# Altium PCB Dumber.PcbDoc
Units mm, origin at the board's own origin, x right, y up, seen from the top; angles counter-clockwise.
Board outline 86 x 88 mm, 2 copper layers (Top Layer, Bottom Layer); 55 components, 52 nets, 255 pads, 217 vias.
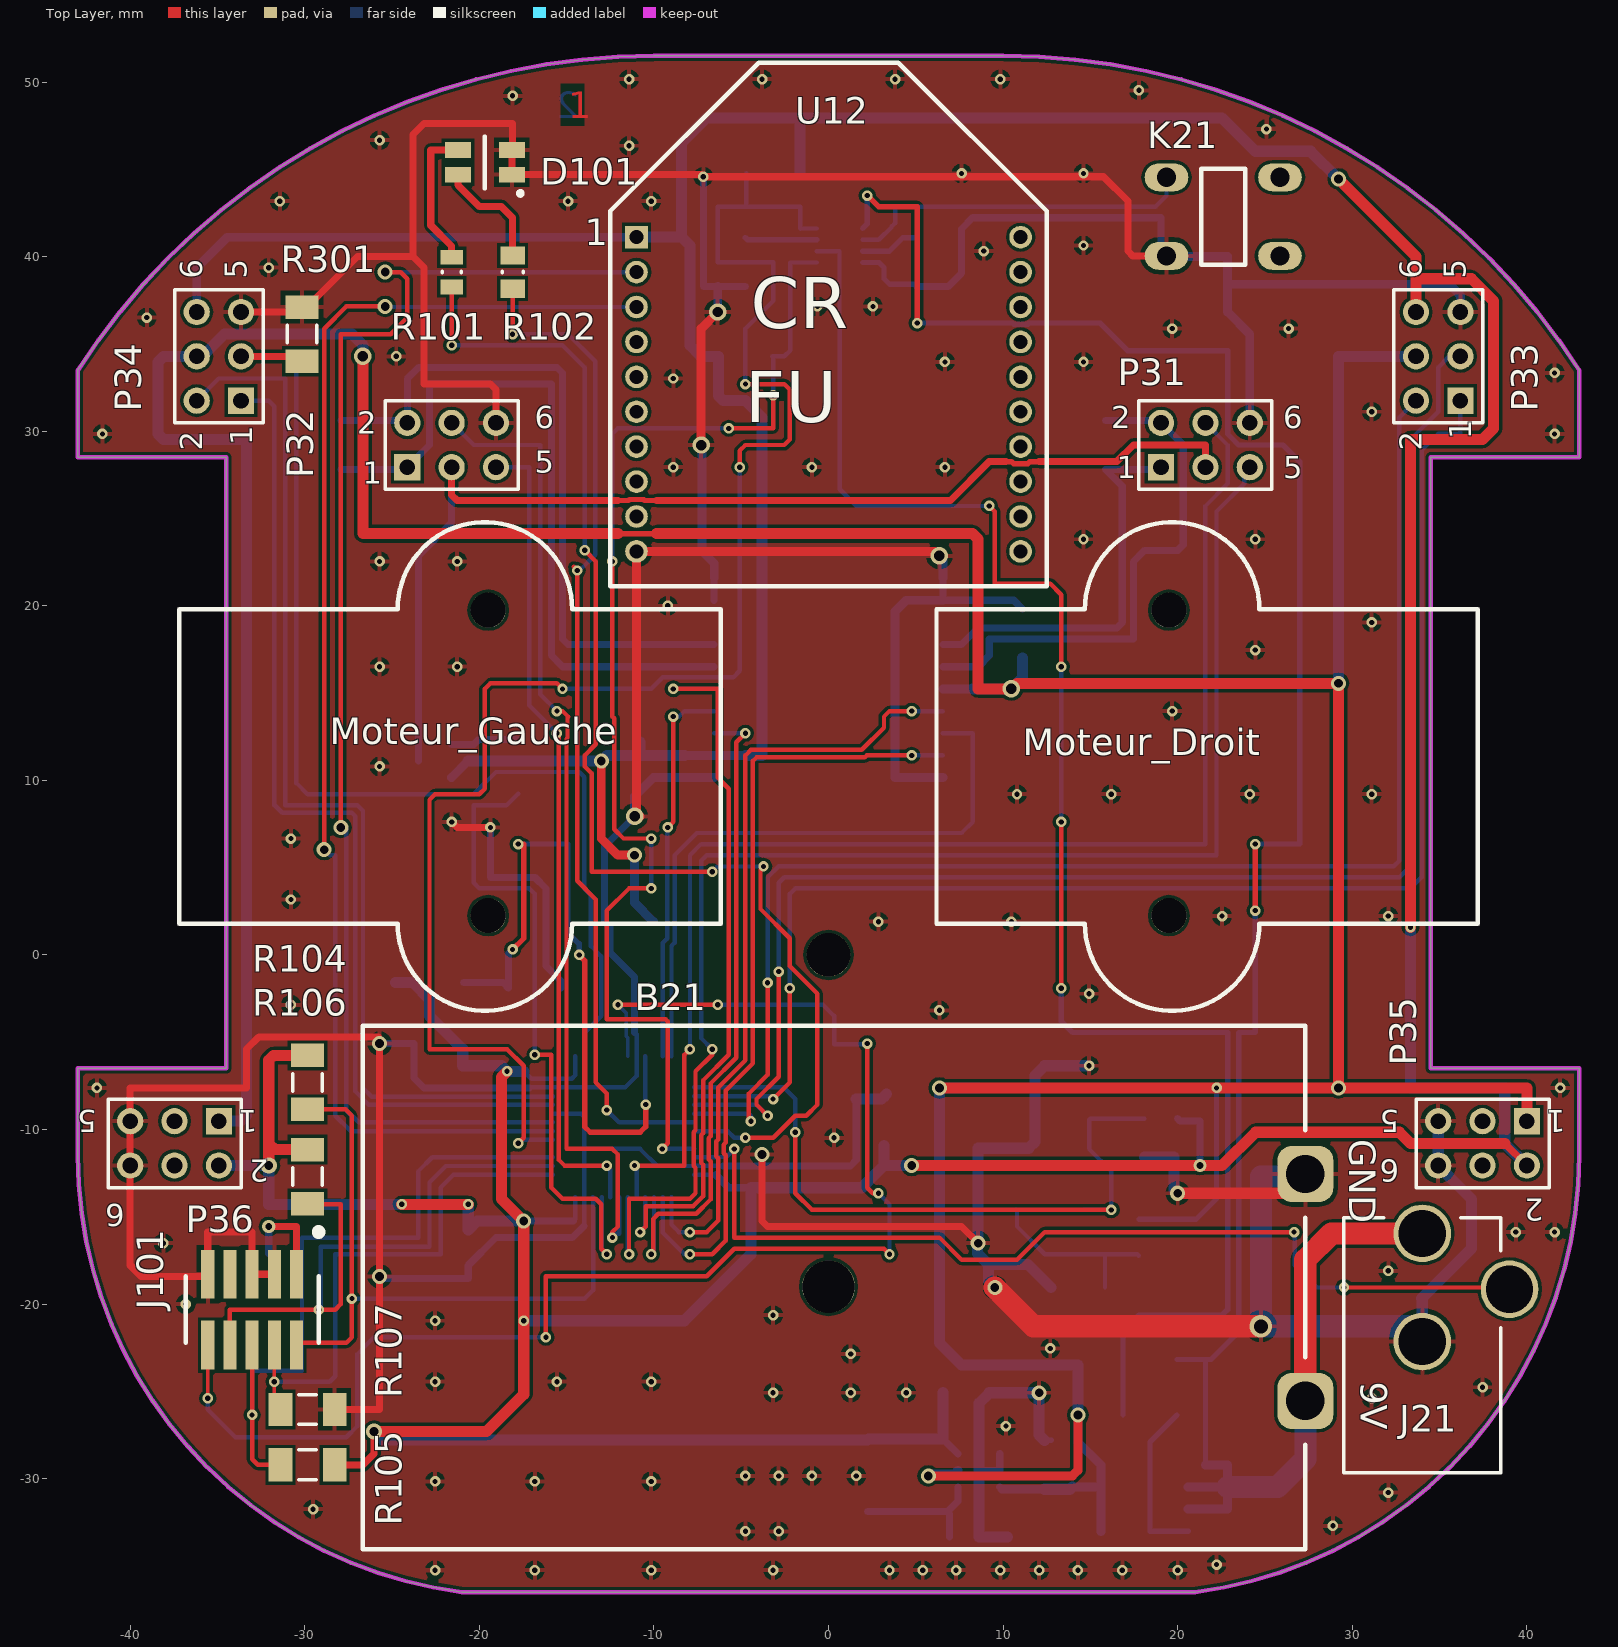
[diagram p0: Top Layer view]
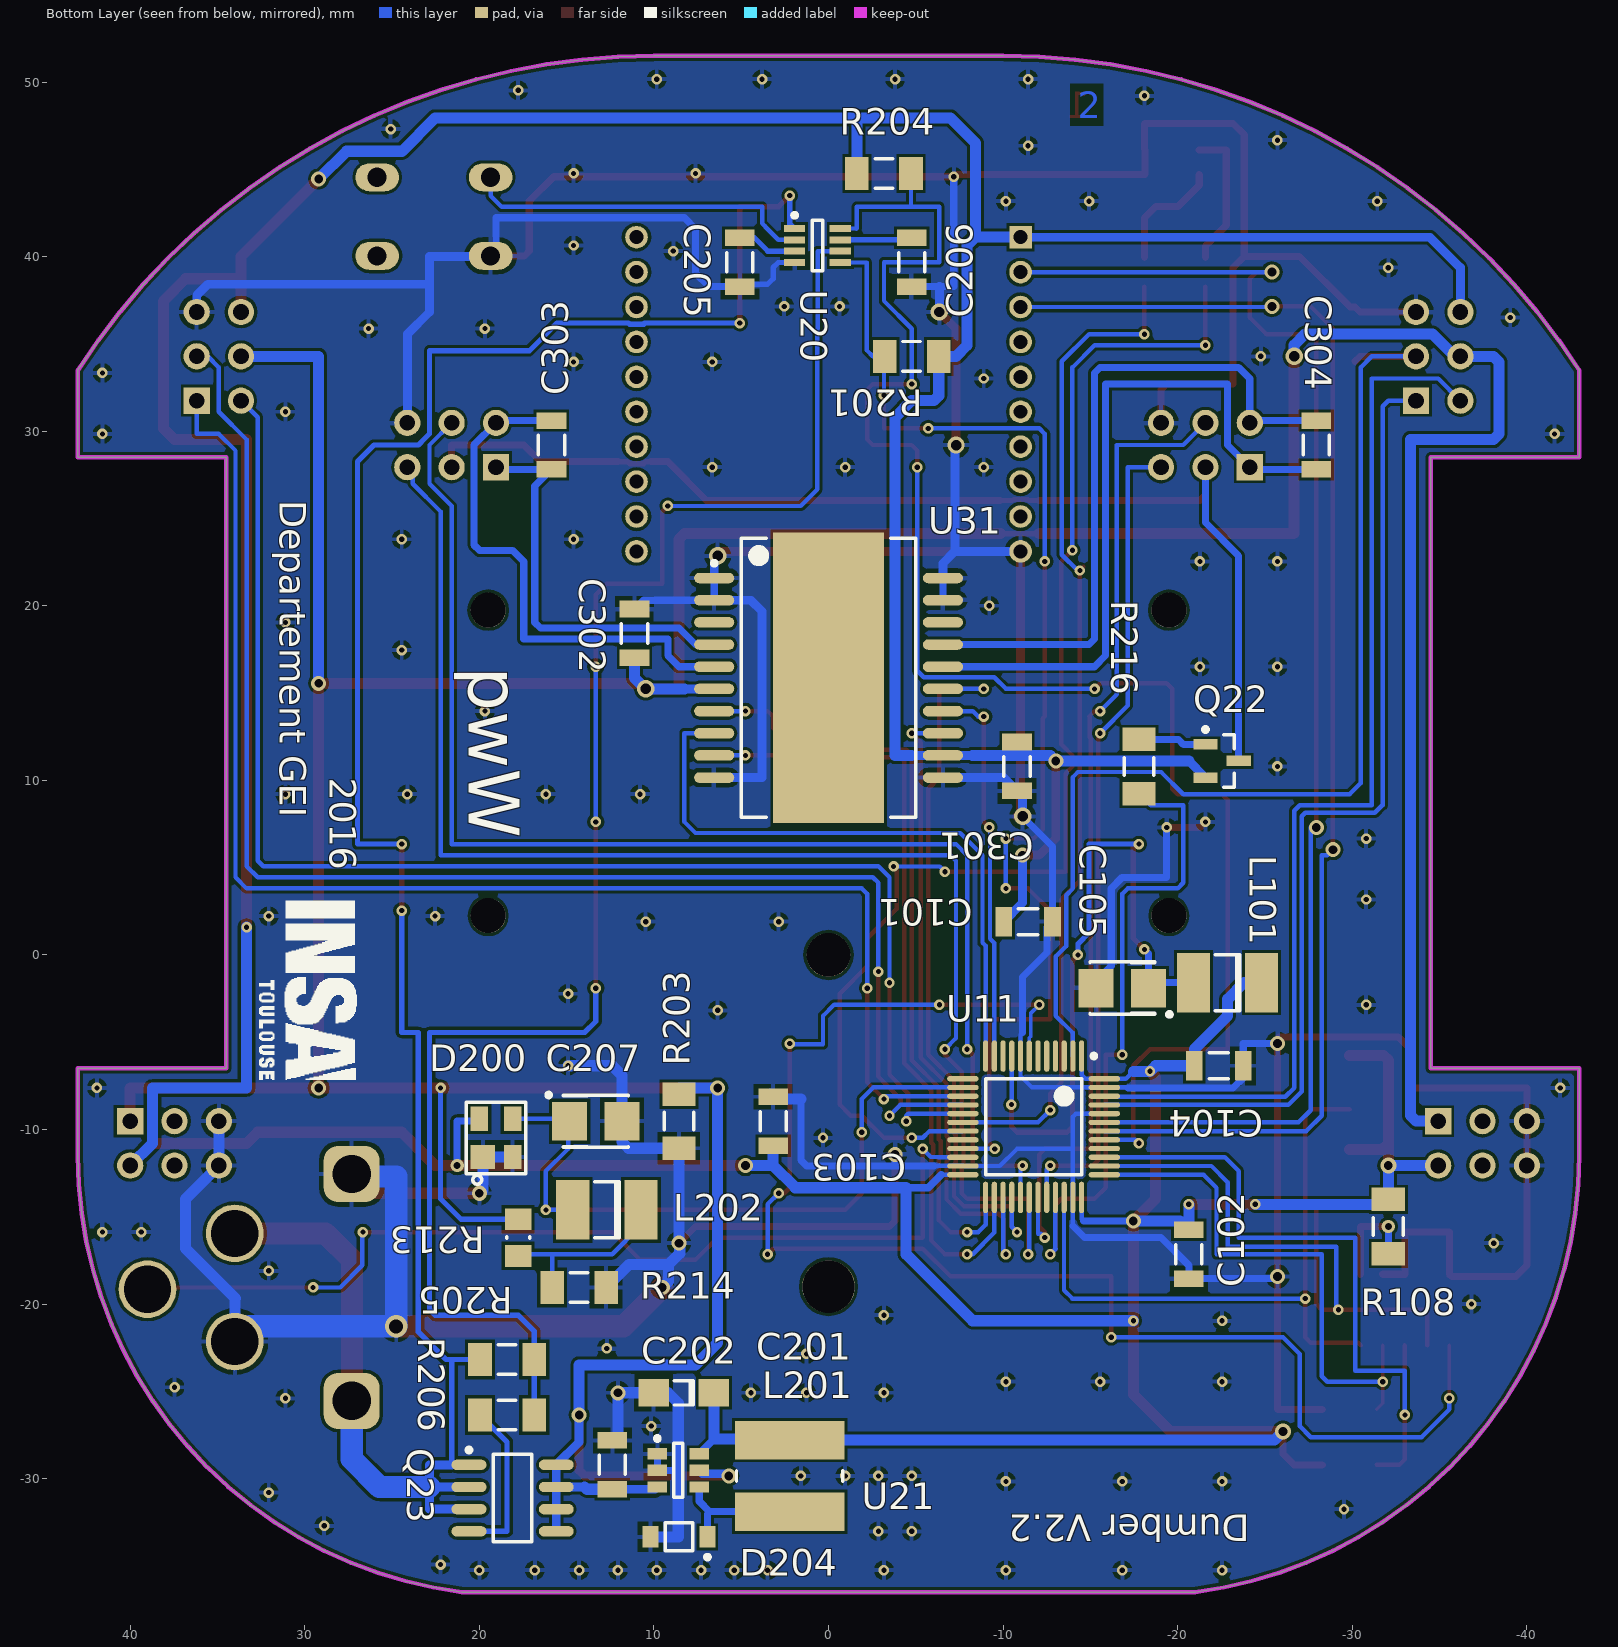
[diagram p1: Bottom Layer view, seen from below]

## Layer stack, top to bottom
Top Solder: solder mask 0.0102, Solder Resist, Dk 3.5
Top Layer: signal copper 0.0356
Dielectric 1: dielectric 0.32, FR-4, Dk 4.8
Bottom Layer: signal copper 0.0356
Bottom Solder: solder mask 0.0102, Solder Resist, Dk 3.5

## Board outline
34.5,28.5 43,28.5 43,33.5 41.838,35.204 40.588,36.845 39.254,38.419 37.838,39.919 36.346,41.344 34.781,42.688 33.148,43.948 31.451,45.12 29.694,46.202 27.883,47.189 26.023,48.081 24.118,48.873 22.174,49.564 20.197,50.152 18.192,50.636 16.164,51.013 14.119,51.283 12.062,51.446 10,51.5 -10,51.5 -12.062,51.446 -14.119,51.283 -16.164,51.013 -18.192,50.636 -20.197,50.152 -22.174,49.564 -24.118,48.873 -26.023,48.081 -27.883,47.189 -29.694,46.202 -31.451,45.12 -33.148,43.948 -34.781,42.688 -36.346,41.344 -37.838,39.919 -39.254,38.419 -40.588,36.845 -41.838,35.204 -43,33.5 -43,28.5 -34.5,28.5 -34.5,-6.5 -43,-6.5 -43,-11.5 -42.946,-13.152 -42.783,-14.798 -42.513,-16.429 -42.137,-18.039 -41.656,-19.62 -41.072,-21.167 -40.389,-22.672 -39.608,-24.129 -38.733,-25.532 -37.768,-26.875 -36.717,-28.151 -35.585,-29.355 -34.376,-30.483 -33.096,-31.529 -31.75,-32.489 -30.344,-33.359 -28.883,-34.135 -27.376,-34.813 -25.827,-35.391 -24.243,-35.866 -22.632,-36.236 -21,-36.5 21,-36.5 22.632,-36.236 24.243,-35.866 25.827,-35.391 27.376,-34.813 28.883,-34.135 30.344,-33.359 31.75,-32.489 33.096,-31.529 34.376,-30.483 35.585,-29.355 36.717,-28.151 37.768,-26.875 38.733,-25.532 39.608,-24.129 40.389,-22.672 41.072,-21.167 41.656,-19.62 42.137,-18.039 42.513,-16.429 42.783,-14.798 42.946,-13.152 43,-11.5 43,-6.5 34.5,-6.5

## Design rules (kind name [scope] priority, off if disabled: settings)
Clearance [All] p1: gap=0.178
ComponentClearance [All] p1 off: gap=0 collisioncheckmode=3 verticalgap=2540 showdistances=FALSE
HoleSize [All] p1: absolutevalues=TRUE maxlimit=6 minlimit=0.3 maxpercent=80.000 minpercent=20.000
MinimumAnnularRing [IsPad] p1: minimumring=0.203
MinimumSolderMaskSliver [All] p1: minsoldermaskwidth=0.046
PolygonConnect [All] p1: connectstyle=Relief reliefconductorwidth=0.254 reliefentries=4 polygonreliefangle="90 Angle" airgapwidth=0.254
RoutingVias RoutingVias__Power2 [InNetClass('Charge_Power')] p1: holewidth=0.6 width=1 viastyle="Through Hole" minholewidth=0.3 minwidth=0.6 maxholewidth=0.8 maxwidth=1.3
RoutingVias RoutingVias_power [InNetClass('Main_Power')] p2: holewidth=0.6 width=1 viastyle="Through Hole" minholewidth=0.4 minwidth=0.76 maxholewidth=0.7 maxwidth=1.22
RoutingVias [All] p3: holewidth=0.4 width=0.76 viastyle="Through Hole" minholewidth=0.3 minwidth=0.6 maxholewidth=0.5 maxwidth=0.86
SMDNeckDown [All] p1: percent=95.000
SilkToSilkClearance [All] p1: silktosilkclearance=0.1
SilkToSolderMaskClearance [IsPad] p1: minsilkscreentomaskgap=0.1 clearancetoexposedcopper=TRUE
SolderMaskExpansion [All] p1: expansion=0.102
UnpouredPolygon [All] p1: allowunpoured=FALSE
Width Width_Bat [InNetClass('Charge_Power')] p1: maxlimit=1.27 minlimit=0.203 preferedwidth=0.635
Width Width_Main [InNetClass('Main_Power')] p2: maxlimit=0.889 minlimit=0.203 preferedwidth=0.508
Width [All] p3: maxlimit=0.406 minlimit=0.203 preferedwidth=0.305
24 further rules are at their usual default settings.

## Classes and differential pairs
net class Main_Power: 3V3 3V3_ENCODERS 9V
net class Charge_Power: GND VBAT
component class Power: B21 C201 C202 C205 C206 C207 D200 D204 J21 K21 L201 L202 Q22 Q23 R201 R203 R204 R205 R206 R213 R214 R216 U20 U21
component class Mecanique: C301 C302 C303 C304 Moteur_Droit Moteur_Gauche P31 P32 P33 P34 P35 P36 R301 U31
component class cpu: C101 C102 C103 C104 C105 D101 J101 L101 R101 R102 R104 R105 R106 R107 R108 U11 U12

## Components (designator, comment, footprint, x,y, rotation, side; value= is the part's Value field where it differs from the comment)
B21 "Batterie" batterie 0.318,-19.05 r180 top locked
C101 "CAP 100nF" CAPC1206(3216)170_L -11.43,1.905 r0 bottom
C102 "CAP 100nF" CAPC1206(3216)170_L -20.637,-17.145 r90 bottom
C103 "CAP 100nF" CAPC1206(3216)170_L 3.175,-9.525 r270 bottom
C104 "CAP 100nF" CAPC1206(3216)170_L -22.355,-6.35 r0 bottom
C105 "T491B" B#1 -16.828,-1.905 r0 bottom
C201 "CAP 10µF" CAPC1206(3216)100_L 12.383,-29.21 r270 bottom
C202 "CAP 150µF" B#2 8.29,-25.082 r0 bottom
C205 "CAP 10nf" CAPC1206(3216)170_L 5.08,39.688 r90 bottom
C206 "CAP 68nF" CAPC1206(3216)170_L -4.763,39.688 r90 bottom
C207 "T491B" B#1 13.335,-9.525 r180 bottom
C301 "CAP 100nF" CAPC1206(3216)170_L -10.795,10.795 r270 bottom
C302 "CAP 100nF" CAPC1206(3216)170_L 11.112,18.415 r90 bottom
C303 "CAP 100nF" CAPC1206(3216)170_L 15.875,29.21 r270 bottom
C304 "CAP 100nF" CAPC1206(3216)170_L -27.94,29.21 r270 bottom
D101 "150141RV73100" 3528_A -19.685,45.402 r180 top
D200 "8240136" SOT143-4L 19.05,-10.477 r90 bottom
D204 "MBR130T1G" ONSC-SOD-123-2-425-04_V 8.572,-33.337 r0 bottom
J21 "WURTH-PWR_2.5" Wurth_2.5 36.513,-19.05 r90 top
J101 "Cortex-M Debug 10pins" "Cortex M Debug" -33.02,-20.32 r180 top locked
K21 "SPST MicroSwitch" SPST_MicroSwitch 22.86,42.545 r180 top
L101 "Inductor" 1812 -22.86,-1.587 r0 bottom
L201 "744052220" WE-TPC-5818-L 2.222,-29.845 r90 bottom
L202 "Inductor" 1812 12.7,-14.605 r0 bottom
Moteur_Droit "Bloc_roue" "Bloc roue"#1 -19.685,10.795 r180 top locked
Moteur_Gauche "Bloc_roue" "Bloc roue"#2 19.685,10.795 r0 top locked
P31 "Moteur gauche" HDR2X3 19.05,27.94 r0 top locked
P32 "Moteur droit" HDR2X3 -24.13,27.94 r0 top locked
P33 "Header 3X2" HDR2X3 36.195,31.75 r90 top locked
P34 "Header 3X2" HDR2X3 -33.655,31.75 r90 top locked
P35 "Header 3X2" HDR2X3 40.005,-9.525 r180 top locked
P36 "Header 3X2" HDR2X3 -34.925,-9.525 r180 top locked
Q22 "PMV50XP,215" NXP-SOT23_N -22.542,11.112 r180 bottom
Q23 "SI4435DY" SO-8_N 18.098,-31.115 r180 bottom
R101 "1K8 5% 0805(2012)" RESC0805(2012)_N -18.098,39.115 r270 top
R102 "330R 5% 0805(2012)" RESC0805(2012)_L -21.59,39.115 r270 top
R104 "10K" RESC1206(3216)_M -29.845,-7.302 r90 top
R105 "10K" RESC1206(3216)_M -29.845,-29.21 r0 top
R106 "10K" RESC1206(3216)_M -29.845,-12.7 r90 top
R107 "10K" RESC1206(3216)_M -29.845,-26.035 r180 top
R108 "10K" RESC1206(3216)_M -32.067,-15.557 r90 bottom
R201 "10K" RESC1206(3216)_M -4.763,34.29 r0 bottom
R203 "10K" RESC1206(3216)_M 8.572,-9.525 r270 bottom
R204 "100K" RESC1206(3216)_M -3.175,44.767 r180 bottom
R205 "270K" RESC1206(3216)_M 18.415,-23.177 r180 bottom
R206 "270K" RESC1206(3216)_M 18.415,-26.352 r180 bottom
R213 "270K 5% 0805(2012)" RESC0805(2012)_M 17.78,-16.192 r90 bottom
R214 "100K" RESC1206(3216)_M 14.287,-19.05 r180 bottom
R216 "1K" RESC1206(3216)_M -17.78,10.795 r270 bottom
R301 "10K" RESC1206(3216)_M -30.162,35.56 r90 top
U11 "STM32F103C6T6" LQFP48_N -11.747,-9.842 r270 bottom
U12 "XBee" XBee 0,31.115 r0 top locked
U20 "LTC2954CTS8-2#TRPBF" LT-TS8-8-TSOT-23_V 0.635,40.64 r180 bottom
U21 "MAX1837EUT33" SOT23-6 8.608,-29.527 r180 bottom
U31 "L298P" PowerSO20_N 0,15.875 r180 bottom

## Footprints (in the part's own frame and the unit in brackets; to place one, negate y for a bottom-side part, rotate by r counter-clockwise, add the part's x,y. Pads: shape width x height; smd on the part's side, far side on the other; paste and mask are expansions set on the pad)
1812 [mm] "Chip Capacitor; Body 4.5 x 3.2 mm (LxW typ)"
  rect 1.9x3.4 smd: 1(-1.95,0) 2(1.95,0)
  silkscreen extent -0.7,-1.6 0.7,1.6
3528_A [mm] "Chip LED, 4-Leads, Body 2.8x3.5mm (max), Pitch 1.42mm, IPC Medium Density"
  rect 1.5x0.9 smd: 1(1.55,0.707) 2(1.55,-0.71) 3(-1.55,0.707) 4(-1.55,-0.707)
  silkscreen extent -2.16,-1.5 0.03,1.9, body extent -1.75,-1.4 1.75,1.4, height 1.87
B#1 [mm] "Capacitor, SM Tantalum; Body 3.5 x 2.8 mm (LxW typ)"
  rect 2x2.2 smd: 1(-1.5,0) 2(1.5,0)
  silkscreen extent -2.82,-1.5 1.85,1.62
B#2 [mm] "Chip Capacitor; Body 3.81 x 1.27 mm (LxW typ)"
  rect 1.75x1.6 smd: 1(-1.725,0) 2(1.725,0)
  silkscreen extent -0.55,-0.7 0.55,0.7
batterie [mm]
  rrect50% 3.2x3.2 hole 2.2: V+(-27,6.5) V-(-27,-6.5)
  silkscreen extent -27,-15 27,15
"Bloc roue"#1 [mm]
  round 0 all layers, no hole: 0(-0.185,8.545) 1(-0.185,-8.955)
  silkscreen extent -13.5,-14 17.5,14
"Bloc roue"#2 [mm]
  round 0 all layers, no hole: 0(-0.185,8.955) 1(-0.185,-8.545)
  silkscreen extent -13.5,-14 17.5,14
CAPC1206(3216)100_L [mm] "Chip Capacitor, Body 3.2x1.6mm, Height 1mm, IPC High Density"
  rect 0.95x1.7 smd: 1(-1.4,0) 2(1.4,0)
  silkscreen extent -0.55,-0.75 0.55,0.75, body extent -1.7,-0.9 1.7,0.9, height 1
CAPC1206(3216)170_L [mm] "Chip Capacitor, Body 3.2x1.6mm, Height 1.7mm, IPC High Density"
  rect 0.95x1.7 smd: 1(-1.4,0) 2(1.4,0)
  silkscreen extent -0.55,-0.75 0.55,0.75, body extent -1.7,-0.9 1.7,0.9, height 1.7
"Cortex M Debug" [mm] "Cortex M debug connector based on SAMTEC FTSH"
  rect 0.75x2.8 smd: 1(-2.54,-2.03) 2(-2.54,2.03) 3(-1.27,-2.03) 4(-1.27,2.03) 5(0,-2.03) 6(0,2.03) 7(1.27,-2.03) 8(1.27,2.03) 9(2.54,-2.03) 10(2.54,2.03)
  silkscreen extent -3.89,-4.52 3.81,1.91
HDR2X3 [mm] "Connector; Header; 3x2 Position"
  rect 1.5x1.5 hole 0.9: 1(0,0)
  round 1.5 hole 0.9: 2(0,2.54) 3(2.54,0) 4(2.54,2.54) 5(5.08,0) 6(5.08,2.54)
  silkscreen extent -1.27,-1.27 6.35,3.81
LQFP48_N [mm] "Thin QFP, 48-Leads, Body 7x7mm, Pitch 0.5mm, IPC Medium Density"
  oval 1.8x0.3 smd: 1(-4.05,2.75) 2(-4.05,2.25) 3(-4.05,1.75) 4(-4.05,1.25) 5(-4.05,0.75) 6(-4.05,0.25) 7(-4.05,-0.25) 8(-4.05,-0.75) 9(-4.05,-1.25) 10(-4.05,-1.75) 11(-4.05,-2.25) 12(-4.05,-2.75) 25(4.05,-2.75) 26(4.05,-2.25) 27(4.05,-1.75) 28(4.05,-1.25) 29(4.05,-0.75) 30(4.05,-0.25) 31(4.05,0.25) 32(4.05,0.75) 33(4.05,1.25) 34(4.05,1.75) 35(4.05,2.25) 36(4.05,2.75)
  oval 0.3x1.8 smd: 13(-2.75,-4.05) 14(-2.25,-4.05) 15(-1.75,-4.05) 16(-1.25,-4.05) 17(-0.75,-4.05) 18(-0.25,-4.05) 19(0.25,-4.05) 20(0.75,-4.05) 21(1.25,-4.05) 22(1.75,-4.05) 23(2.25,-4.05) 24(2.75,-4.05) 37(2.75,4.05) 38(2.25,4.05) 39(1.75,4.05) 40(1.25,4.05) 41(0.75,4.05) 42(0.25,4.05) 43(-0.25,4.05) 44(-0.75,4.05) 45(-1.25,4.05) 46(-1.75,4.05) 47(-2.25,4.05) 48(-2.75,4.05)
  silkscreen extent -4.17,-2.75 2.75,3.57, body extent -3.5,-3.5 3.5,3.5, height 1.6
LT-TS8-8-TSOT-23_V [mm] "SOT23, 8-Leads, Body 2.9x1.75mm, Pitch 0.65mm"
  rect 1.22x0.4 smd: 1(-1.31,0.975) 2(-1.31,0.325) 3(-1.31,-0.325) 4(-1.31,-0.975) 5(1.31,-0.975) 6(1.31,-0.325) 7(1.31,0.325) 8(1.31,0.975)
  silkscreen extent -1.43,-1.45 0.3,1.85, body extent -0.87,-1.45 0.88,1.45, height 1
NXP-SOT23_N [mm] "SOT23, 3-Leads, Body 3x1.4mm, Pitch 0.95mm, IPC Medium Density"
  rect 1.4x0.6 smd: 1(-0.95,0.95) 2(-0.95,-0.95) 3(0.95,0)
  silkscreen extent -1.08,-1.5 0.7,1.92, body extent -0.7,-1.5 0.7,1.5, height 1.1
ONSC-SOD-123-2-425-04_V [mm] "SOD, 2-Leads, Body 2.69x1.6mm"
  rect 0.91x1.22 smd: 1(-1.635,0) 2(1.635,0)
  silkscreen extent -1.76,-0.8 0.78,1.28, body extent -1.35,-0.8 1.35,0.8, height 1.35
PowerSO20_N [mm] "SOP, 20-Leads, Body 15.9x11mm, Pitch 1.27mm, IPC Medium Density"
  oval 2.3x0.6 smd: 1(-6.55,5.715) 2(-6.55,4.445) 3(-6.55,3.175) 4(-6.55,1.905) 5(-6.55,0.635) 6(-6.55,-0.635) 7(-6.55,-1.905) 8(-6.55,-3.175) 9(-6.55,-4.445) 10(-6.55,-5.715) 11(6.55,-5.715) 12(6.55,-4.445) 13(6.55,-3.175) 14(6.55,-1.905) 15(6.55,-0.635) 16(6.55,0.635) 17(6.55,1.905) 18(6.55,3.175) 19(6.55,4.445) 20(6.55,5.715)
  rect 6.35x16.65 smd: 21(0,0)
  silkscreen extent -6.68,-8 5,8, body extent -5.55,-8 5.55,8, height 3.6
RESC0805(2012)_L [mm] "Chip Resistor, Body 2.0x1.3mm, IPC High Density"
  rect 0.85x1.3 smd: 1(-0.85,0) 2(0.85,0)
  silkscreen extent -0.05,-0.55 0.05,0.55, body extent -1.1,-0.67 1.1,0.68, height 0.7
RESC0805(2012)_M [mm] "Chip Resistor, Body 2.0x1.3mm, IPC Low Density"
  rect 1.25x1.5 smd: 1(-1.05,0) 2(1.05,0)
  silkscreen extent -0.05,-0.65 0.05,0.65, body extent -1.1,-0.67 1.1,0.67, height 0.7
RESC0805(2012)_N [mm] "Chip Resistor, Body 2.0x1.3mm, IPC Medium Density"
  rect 1.05x1.4 smd: 1(-0.95,0) 2(0.95,0)
  silkscreen extent -0.05,-0.6 0.05,0.6, body extent -1.1,-0.67 1.1,0.68, height 0.7
RESC1206(3216)_M [mm] "Chip Resistor, Body 3.2x1.6mm, IPC Low Density"
  rect 1.35x1.9 smd: 1(-1.55,0) 2(1.55,0)
  silkscreen extent -0.5,-0.85 0.5,0.85, body extent -1.67,-0.87 1.67,0.87, height 0.75
SO-8_N [mm] "SOIC, 8-Leads, Body 4.9x3.9mm, Pitch 1.27mm, IPC Medium Density"
  oval 2x0.6 smd: 1(-2.5,1.905) 2(-2.5,0.635) 3(-2.5,-0.635) 4(-2.5,-1.905) 5(2.5,-1.905) 6(2.5,-0.635) 7(2.5,0.635) 8(2.5,1.905)
  silkscreen extent -2.63,-2.5 1.1,2.88, body extent -2,-2.5 2,2.5, height 1.75
SOT23-6 [mm]
  rect 1.1x0.65 smd: 1(-1.2,0.95) 2(-1.2,0) 3(-1.2,-0.95) 4(1.2,-0.95) 5(1.2,0) 6(1.2,0.95)
  silkscreen extent -1.32,-1.55 0.25,1.95, body extent -0.9,-1.55 0.9,1.55, height 1.45
SOT143-4L [mm] "SOT143-4L, 4-Leads, Body 2.95x2.4mm, Pitch 1.70/1.90mm"
  rect 1.4x1.4 smd: 1(-1.1,0.75)
  rect 1.4x1 smd: 2(-1.1,-0.95) 3(1.1,-0.95) 4(1.1,0.95)
  silkscreen extent -2.66,-1.7 2.05,1.7, body extent -1.2,-1.46 1.2,1.46, height 1.03
SPST_MicroSwitch [mm]
  oval 2.5x1.6 hole 1.1: 1(-3,2.5) 2(3.5,2.5) 3(-3,-2) 4(3.5,-2)
  silkscreen extent -1,-2.5 1.5,3
WE-TPC-5818-L [mm] "SMD Inductor, 2-Leads, Body 5.8 x 5.8 mm"
  rect 2.2x6.3 smd: 1(-2.05,0) 2(2.05,0)
  silkscreen extent -0.3,-3.05 0.3,3.05, body extent -2.9,-2.9 2.9,2.9, height 1.79
Wurth_2.5 [mm]
  round 3.3 hole 2.7: 1(3.1,2.5) 2(-3.1,2.5) 3(-0.1,-2.5)
  silkscreen extent -10.6,-2 4,7
XBee [mm] "XBee RF transceiver from Digi"
  rect 1.295x1.295 hole 0.8: 1(-11,10)
  round 1.295 hole 0.8: 2(-11,8) 3(-11,6) 4(-11,4) 5(-11,2) 6(-11,0) 7(-11,-2) 8(-11,-4) 9(-11,-6) 10(-11,-8) 11(11,-8) 12(11,-6) 13(11,-4) 14(11,-2) 15(11,0) 16(11,2) 17(11,4) 18(11,6) 19(11,8) 20(11,10)
  silkscreen extent -12.5,-10 12.5,20

## Part data
B21: "Keystone 1294"
C101 C102 C103 C104 C205 C206 C301 C302 C303 C304: library part CMP-1037-04201-1, "CAP 100nF 50V ±10% 1206 (3216 Metric) Thickness 1.7mm SMD"
C105 C207: "Solid Tantalum Chip Capacitor, Standard T491 Series - Industrial Grade"
C201: library part CMP-1037-01131-1, "CAP 10µF 25V ±10% 1206 (3216 Metric) Thickness 1mm SMD"
C202: library part 194D225X0015B2, "CAP Tantalum, Body B, 150µF / 6.3V"
D101: library part CMP-1430-00001-1, "SMD Bi-Color Top LED, WL-SBTW, Red & Bright Green"
D200: library part CMP-1486-00002-1, "TVS Diode WE-TVS-HS, VRWM=3.3V"
D204: library part CMP-1055-00423-1, "Schottky Power Rectifier, 2-Pin SOD-123, Pb-Free, Tape and Reel"
J21: "Low Voltage Power Supply Connector"
K21: "SPST - MicroSwitch"
L101 L202: "Inductor SMD"
L201: library part CMP-0227-00400-1, "SMD Shielded Tiny Power Inductor WE-TPC, L = 22.0 µH"
P31 P32: library part "Header 3X2", "Header, 3-Pin, Dual row"
P33 P34 P35 P36: "Header, 3-Pin, Dual row"
Q22: library part CMP-1258-00162-1, "Single P-Channel Trench MOSFET, -20 V, -55 to 150 degC, 3-Pin SOT23, Tape and Reel"
Q23: "P-Channel 30V (D-S) Rated  MOSFET"
R101: library part CMP-1013-00080-1, "1K8 0.125W 5% 0805 (2012 Metric)  SMD"
R102: library part CMP-1013-00062-1, "330R 0.125W 5% 0805 (2012 Metric)  SMD"
R104 R105 R106 R107 R108 R201 R203 R204 R205 R206 R214 R216 R301: library part CMP-1014-00098-1, "10K 0.25W 5% 1206 (3216 Metric)  SMD"
R213: library part CMP-1013-00132-1, "270K 0.125W 5% 0805 (2012 Metric)  SMD"
U11: "STM32 ARM-based 32-bit MCU with 32 Kbytes Flash, 48-pin LQFP, Industrial Temperature"
U12: "Xbee RF transceiver from Digi"
U20: library part CMP-0482-01492-1, "Pushbutton On / Off  Controller with µP Interrupt, 8-pin SOT23 (TS8-8), 0 to 70 degC, Pb-Free, Tape and Reel"
U21: library part MAX1837
U31: "Dual Full Bridge Driver"

## Free pads (board coordinates)
  round 2 hole 2 unplated: 1(-19.5,2.25) 1(-19.5,19.75) 1(19.5,2.25) 1(19.5,19.75)
  round 3 hole 3 unplated: 1(0,-19)
  round 2.5 hole 2.5 unplated: 1(0,0)

## Via types
v1: diameter 0.6, hole 0.3, Top Layer to Bottom Layer, tented both sides, 185 vias
v2: diameter 0.86, hole 0.5, Top Layer to Bottom Layer, tented both sides, 21 vias
v3: diameter 1, hole 0.6, Top Layer to Bottom Layer, tented both sides, 6 vias
v4: diameter 0.76, hole 0.4, Top Layer to Bottom Layer, tented both sides, 2 vias
v5: diameter 0.92, hole 0.5, Top Layer to Bottom Layer, tented both sides, 2 vias
v6: diameter 1.3, hole 0.8, Top Layer to Bottom Layer, tented both sides, 1 vias

## Nets (pads, with @x,y where several pads share a name; then routed paths per layer and width w, separated by ;. In a path a pad name is that pad's centre, name@x,y a point inside that pad or via, vN(x,y) a via of type N, cw(c..) or ccw(c..) an arc to the next point about the centre after c; other vN are vias at no path point)
3V3: C101.2 C102.2 C103.2 C104.2 C202.1 C301.1 D200.4 L101.1 L201.2 P33.6 P34.6 P35.2 P36.2 Q22.2 R104.2 R105.2 R106.2 R108.2 R201.1 R204.1 U11.1 U11.24 U11.36 U11.48 U12.1 U21.6 U31.12 | length 409.7
  Top Layer w0.406: R105.2 -26.67,-29.21 -26.035,-28.575 v5(-26.035,-27.305) ; 38.735,-10.795 P35.2
  Top Layer w0.508: v2(-13.018,11.112) -13.018,6.667 -12.065,5.715 v2(-11.112,5.715)
  Top Layer w0.635: v5(-32.067,-12.065) -32.067,-10.795 ; R106.2 -31.713,-11.15 -32.067,-10.795 ; R104.2 -31.787,-5.752 -32.067,-6.032 -32.067,-10.795 ; v5(-26.035,-27.305) -19.583,-27.305 -17.462,-25.185 v1(-17.462,-20.955) v2(-17.462,-15.24) -18.732,-13.97 -18.732,-6.985 v1(-18.415,-6.667) ; v1(-24.447,-14.287) v1(-20.637,-14.287) ; v2(4.763,-12.065) v4(21.273,-12.065) 22.543,-12.065 24.447,-10.16 32.703,-10.16 33.338,-10.795 38.735,-10.795 ; v2(29.21,44.45) 33.655,40.005 33.655,38.735 ; v1(33.338,1.587) 33.338,29.527 37.465,29.527 38.1,30.162 38.1,37.465 36.83,38.735 33.655,38.735 ; P33.6 33.655,38.735
  Bottom Layer w0.254: -17.462,-6.667 -17.037,-7.093 U11.48 -14.713,-7.093 -14.498,-6.878 U11.1 ; -14.605,-15.24 -14.498,-15.133 U11.36 ; U11.24 -6.457,-12.593
  Bottom Layer w0.406: v5@-32.385,-12.065 v5(-32.067,-12.065) ; v2(-17.462,-15.24) -14.605,-15.24 ; -6.457,-12.593 -5.715,-13.335 -4.445,-13.335 ; -1.625,47.905 -1.587,47.942 ; 6.745,-27.915 U21.6 ; D200.4 20.148,-9.525 21.273,-9.525 v4(21.273,-12.065)
  Bottom Layer w0.508: P34.6 -36.195,39.37 -34.45,41.115 U12.1 ; Q22.2 -20.643,11.112 ; v2(-11.112,5.715) -11.112,2.988 C101.2 ; -8.255,11.43 -6.868,11.43 -4.762,11.43
  Bottom Layer w0.635: P36.2 v5@-32.385,-12.065 ; v5@-32.067,-12.383 -32.067,-14.287 v1(-24.447,-14.287) ; v5(-26.035,-27.305) -25.545,-27.795 L201.2 2.282,-27.735 6.565,-27.735 C202.1 ; L101.1 -23.812,-1.587 -22.86,-2.54 -22.86,-3.492 -20.955,-5.397 C104.2 ; C104.2@-20.825,-6.35 -18.732,-6.35 v1(-18.415,-6.667) -17.462,-6.667 ; -20.643,11.112 v2(-13.018,11.112) -12.7,11.43 -10.795,11.43 ; v1(-20.637,-14.287) C102.2 -20.133,-15.24 v2(-17.462,-15.24) ; v1(-17.462,-20.955) -8.255,-20.955 -4.445,-17.145 -4.445,-13.335 1.905,-13.335 3.175,-12.065 ; U12.1 -8.413,41.115 ; C301.1 -10.795,11.43 ; -8.255,11.43 -10.795,11.43 ; -4.762,11.43 -3.81,11.43 -3.81,30.797 -4.763,31.75 -6.032,31.75 -6.312,32.03 R201.1 -7.302,34.29 -7.938,34.925 -7.938,40.64 -8.413,41.115 ; R204.1 -1.625,47.905 ; C103.2 3.175,-12.065 ; v2(4.763,-12.065) 3.175,-12.065 ; v2(29.21,44.45) 27.622,46.037 24.447,46.037 22.543,47.942 -1.587,47.942 -6.985,47.942 -8.413,46.515 -8.413,41.115 ; v1(33.338,1.587) 33.338,-7.62 38.735,-7.62 38.735,-10.795 P35.2
3V3_ENCODERS: P31.3 P32.3 Q22.3 | length 65.2
  Top Layer w0.305: -12.065,26.035 -11.463,26.035 -11.405,26.093 -10.595,26.093 -10.537,26.035 -9.842,26.035 ; 10.16,28.258 10.475,28.258 10.595,28.137 11.405,28.137 11.525,28.258 12.065,28.258
  Top Layer w0.406: P32.3 -21.59,26.353 -21.272,26.035 -12.065,26.035 ; -9.842,26.035 6.985,26.035 9.207,28.258 10.16,28.258 ; 12.065,28.258 16.51,28.258 17.462,29.21 21.59,29.21 P31.3
  Bottom Layer w0.406: Q22.3 -23.492,22.863 -21.59,24.765 P32.3
9V: C201.2 C302.1 P33.4 P34.4 P35.1 P36.1 Q23.5 Q23.6 Q23.7 Q23.8 R203.1 R213.2 U21.3 U21.5 U31.6 | length 292.7
  Top Layer w0.305: -12.065,24.13 -9.842,24.13
  Top Layer w0.508: v2(5.715,-29.845) 13.97,-29.845 14.287,-29.527 v2(14.287,-26.352) ; v3(10.477,15.24) v3@10.795,15.557
  Top Layer w0.635: v3(-26.67,34.29) -26.67,24.13 -12.065,24.13 ; -9.842,24.13 8.255,24.13 8.573,23.812 8.573,15.24 v3(10.477,15.24) ; v2(6.35,-7.62) v2(29.21,-7.62) ; v3@10.795,15.557 v2(29.21,15.557) v2(29.21,-7.62) ; 29.21,-6.985 v2(29.21,-7.62) ; P35.1 40.005,-7.62 v2(29.21,-7.62)
  Bottom Layer w0.305: R213.2 21.053,-15.142 22.225,-13.97 v1(22.225,-7.62)
  Bottom Layer w0.406: U21.3 U21.3@9.94,-30.61
  Bottom Layer w0.508: v2(5.715,-29.845) 5.839,-29.721 7.214,-29.721 U21.5 ; U31.6 8.255,15.24 ; U21.3@9.94,-30.61 C201.2 ; 13.97,-30.48 Q23.7 ; v2(14.287,-26.352) 14.287,-27.9 Q23.8 Q23.7 ; Q23.5 Q23.6 Q23.7
  Bottom Layer w0.635: P36.1 -33.655,-9.525 -33.337,-9.207 -33.337,29.527 -38.1,29.527 -38.417,29.845 -38.417,33.972 -38.1,34.29 P34.4 -35.878,34.29 -34.607,35.56 -27.305,35.56 -26.67,34.925 v3(-26.67,34.29) ; 8.255,15.24 v3(10.477,15.24) 11.112,15.875 C302.1 ; R203.1@8.572,-7.62 v2(6.35,-7.62) 6.35,-22.225 7.62,-23.495 14.287,-23.495 v2(14.287,-26.352) ; C201.2 13.84,-30.61 13.97,-30.48 ; v2(29.21,15.557) 29.21,18.732 29.21,34.29 P33.4
/RST: J101.10 U11.7 | length 84.6
  Top Layer w0.203: v1(-35.56,-25.4) J101.10
  Top Layer w0.254: v1(-16.192,-21.907) -16.192,-18.415 -6.985,-18.415 -5.397,-16.828 3.175,-16.828 v1(3.492,-17.145) ; v1(-12.065,-2.857) v1(-6.35,-2.857) ; v1(2.222,-5.08) 2.222,-13.335 2.54,-13.652 v1(2.857,-13.652)
  Bottom Layer w0.203: v1(-12.065,-2.857) -11.595,-3.327 -11.595,-4.645 -11.498,-4.742 U11.7
  Bottom Layer w0.254: v1(-35.56,-25.4) -35.56,-26.035 -33.972,-27.622 -27.622,-27.622 -26.987,-26.987 -26.987,-22.86 -26.035,-21.907 v1(-16.192,-21.907) ; v1(-6.35,-2.857) -0.318,-2.857 0.317,-3.492 0.317,-5.118 2.185,-5.118 v1(2.222,-5.08) ; v1(2.857,-13.652) 3.492,-14.287 v1(3.492,-17.145)
BUTTON_SENSE: R201.2 U11.21 U20.5 | length 71.2
  Top Layer w0.254: v1(-12.383,22.543) -12.383,13.652 -12.283,13.553 -12.283,7.203 -11.747,6.667 v1(-10.16,6.667) ; v1(-10.16,3.81) -11.43,3.81 -12.7,2.54 -12.7,-3.696 -9.322,-3.696 -9.207,-3.81 -9.207,-10.795 v1(-9.525,-11.112) ; v1(-5.715,30.162) -3.175,30.162 v1(-3.175,32.067)
  Bottom Layer w0.254: v1(-12.383,22.543) -12.383,29.845 -12.065,30.162 v1(-5.715,30.162) ; v1(-10.16,3.81) v1(-10.16,6.667) ; v1(-9.525,-11.112) -9.505,-11.093 U11.21 ; v1(-3.175,32.067) -3.175,34.252 R201.2 -2.54,34.29 -2.2,34.63 -2.2,39.665 U20.5
CMDDROIT_A: U11.27 U31.13 | length 38.6
  Top Layer w0.254: v1(-10.16,-17.145) -10.046,-17.031 -10.046,-15.126 -9.754,-14.834 -7.58,-14.834 -6.756,-14.01 -6.756,-11.83 -6.866,-11.721 -6.866,-10.504 -6.756,-10.395 -6.756,-7.367 -5.283,-5.894 -5.283,12.179 v1(-4.763,12.7)
  Bottom Layer w0.254: v1(-10.16,-17.145) -9.997,-16.982 U11.27 ; U31.13 v1(-4.763,12.7)
CMDDROIT_B: U11.28 U31.15 | length 42.2
  Top Layer w0.254: v1(-10.795,-15.875) -10.477,-15.557 -10.477,-14.402 -7.759,-14.402 -7.188,-13.831 -7.188,-12.009 -7.298,-11.9 -7.298,-10.325 -7.188,-10.216 -7.188,-7.188 -5.715,-5.715 -5.715,9.525 -6.35,10.16 -6.35,15.24 v1(-8.89,15.24)
  Bottom Layer w0.254: v1(-10.795,-15.875) -10.498,-15.578 U11.28 ; v1(-8.89,15.24) U31.15
CMDGAUCHE_A: U11.25 U31.7 | length 44.8
  Top Layer w0.254: v1(-7.938,-15.875) -6.985,-15.875 -6.325,-15.215 -6.325,-11.651 -6.434,-11.542 -6.434,-10.683 -6.325,-10.574 -6.325,-7.595 -4.763,-6.032 -4.763,11.43 -4.445,11.747 1.905,11.747 3.175,13.018 3.175,13.652 3.492,13.97 v1(4.763,13.97)
  Bottom Layer w0.254: U11.25 -8.997,-15.45 -8.572,-15.875 v1(-7.938,-15.875) ; v1(4.763,13.97) U31.7
CMDGAUCHE_B: U11.26 U31.9 | length 45.7
  Top Layer w0.254: v1(-7.938,-17.145) -6.667,-17.145 -5.886,-16.363 -5.886,-11.479 -6.002,-11.363 -6.002,-10.862 -5.886,-10.746 -5.886,-7.767 -4.331,-6.211 -4.331,11.112 -4.127,11.316 2.084,11.316 2.198,11.43 v1(4.763,11.43)
  Bottom Layer w0.254: U11.26 -9.498,-15.902 -8.255,-17.145 v1(-7.938,-17.145) ; v1(4.763,11.43) U31.9
DETECT_SHIELD: P34.3 R301.1 U11.2 | length 65.1
  Top Layer w0.406: P34.3 -30.442,34.29 R301.1
  Bottom Layer w0.254: P34.3 -31.115,34.29 -30.48,33.655 -30.48,9.842 -29.845,9.207 -20.32,9.207 -19.05,10.477 -14.287,10.477 -13.997,10.187 -13.997,3.81 -13.61,3.422 -13.61,0.506 -13.018,-0.086 -13.018,-3.492 -13.97,-4.445 -13.997,-4.445 U11.2
ENABLE_ENCODERS: R216.2 U11.33 | length 38.4
  Top Layer w0.254: v1(-16.828,-5.715) -15.875,-5.715 -15.875,-13.335 -15.24,-13.97 -13.335,-13.97 -13.018,-14.287 -13.018,-16.828 v1(-12.7,-17.145)
  Bottom Layer w0.254: R216.2 -18.453,8.572 -20.32,8.572 -20.32,4.127 -20.002,3.81 -17.145,3.81 -16.828,3.492 v1(-16.828,-5.715) ; U11.33 -12.997,-16.807 -13.018,-16.828 v1(-12.7,-17.145)
ENCDROIT_A: P32.4 U11.31 | length 57.3
  Top Layer w0.254: v1(-15.557,13.97) -15.24,13.97 -14.922,13.652 -14.953,13.622 -14.953,12.449 -15.011,12.391 -15.011,-11.112 -12.383,-11.112 -12.065,-11.43 -12.065,-15.557 -12.383,-15.875 v1(-12.383,-16.192)
  Bottom Layer w0.254: P32.4 -20.32,29.21 -16.51,29.21 -16.51,14.922 v1(-15.557,13.97) ; v1(-12.383,-16.192) -12.157,-15.967 -11.997,-15.967 U11.31
ENCDROIT_B: P32.5 U11.32 | length 47.1
  Top Layer w0.254: v1(-15.557,12.7) -15.443,12.586 -15.443,-11.747 -15.126,-12.065 v1(-12.7,-12.065)
  Bottom Layer w0.254: P32.5 -17.145,27.94 -17.145,14.287 v1(-15.557,12.7) ; v1(-12.7,-12.065) -12.498,-12.267 U11.32
ENCGAUCHE_A: P31.4 U11.29 | length 77.6
  Top Layer w0.254: v1(-11.112,-12.065) -8.255,-12.065 -8.255,-5.715 v1(-7.938,-5.397)
  Bottom Layer w0.254: v1(-11.112,-12.065) -10.997,-12.18 U11.29 ; v1(-7.938,-5.397) -7.938,5.715 -7.302,6.35 21.59,6.35 21.59,25.717 22.86,26.987 22.86,29.21 P31.4
ENCGAUCHE_B: P31.5 U11.30 | length 82.9
  Top Layer w0.254: v1(-11.43,-17.145) -11.43,-13.97 -7.938,-13.97 -7.62,-13.652 -7.62,-12.188 -7.729,-12.078 -7.729,-10.147 -7.62,-10.037 -7.62,-6.667 -6.667,-5.715 v1(-6.667,-5.397)
  Bottom Layer w0.254: U11.30 -11.498,-17.077 v1(-11.43,-17.145) ; v1(-6.667,-5.397) -7.302,-4.763 -7.302,5.397 -6.985,5.715 22.225,5.715 22.225,25.4 23.812,26.987 23.812,27.623 P31.5
GND: B21.V- C101.1 C102.1 C103.1 C104.1 C105.2 C201.1 C202.2 C205.1 C206.1 C207.2 C301.2 C302.2 D101.3 D101.4 D200.1 D200.2 D204.2 J21.2 J101.3 J101.5 J101.9 K21.2 P31.6 P32.6 P33.5 P34.5 P35.5 P35.6 P36.5 P36.6 R107.1 R203.2 R214.2 R301.2 U11.8 U11.23 U11.35 U11.44 U11.47 U12.10 U20.4 U21.1 U21.2 U31.1 U31.2 U31.10 U31.11 U31.19 U31.20 | length 504.2
  Top Layer w0.406: P34.5 -30.443,36.83 R301.2 -29.883,37.11 -26.987,40.005 -23.812,40.005 ; J101.3 J101.5 -33.02,-15.875 -35.56,-15.875 J101.9 -35.685,-18.415 -39.37,-18.415 -40.005,-17.78 P36.6 P36.5 -40.005,-7.62 -33.337,-7.62 -33.337,-5.397 -32.636,-4.696 v2@-25.784,-4.696 ; R107.1 -25.718,-26.035 v2(-25.717,-18.415) v2(-25.718,-5.08) ; v1(-21.59,7.62) -21.272,7.302 v1(-19.367,7.302) ; P32.6 -19.05,32.385 -19.367,32.703 -23.177,32.703 -23.177,39.37 -23.812,40.005 ; v2(-3.81,-11.43) -3.81,-15.24 -3.492,-15.557 7.62,-15.557 v2(8.572,-16.51) ; K21.2 17.422,40.045 17.145,40.322 17.145,43.18 15.745,44.58 v1(-7.173,44.58) -7.288,44.695 D101.3 D101.4 -18.098,46.147 -18.098,47.625 -23.177,47.625 -23.812,46.99 -23.812,40.005 ; B21.V- B21.V-@27.351,-12.55
  Top Layer w0.508: v3(-11.112,7.938) -10.795,7.938 -11,8.142 U12.10 6.095,23.115 v3(6.35,22.86) ; v3(-7.302,29.21) -7.302,35.877 v3(-6.35,36.83)
  Top Layer w0.635: v2(20.002,-13.652) 26.215,-13.652 B21.V-
  Top Layer w1.27: v2(9.525,-19.05) 11.747,-21.273 v6(24.765,-21.273) ; J21.2@33.655,-22.507 J21.2
  Bottom Layer w0.254: -17.145,-7.62 -17.117,-7.592 U11.47 -11.656,-7.592 -10.997,-6.934 U11.8 -10.997,-4.56 -11.112,-4.445 ; U11.44 -14.173,-9.093 -13.997,-9.268 -13.997,-11.112 ; -13.997,-15.53 U11.35 -13.997,-11.112 ; -6.052,-12.085 -7.698,-12.085 U11.23 -9.815,-12.092 -10.795,-11.112 -13.997,-11.112
  Bottom Layer w0.305: U20.4 2.88,39.665 3.175,39.37 3.175,38.735 3.492,38.417 4.95,38.417 C205.1 ; C201.1 C201.1@12.758,-27.81
  Bottom Layer w0.406: v2(-25.717,-18.415) -25.66,-18.415 -25.53,-18.545 C102.1 -20.637,-17.78 -19.05,-16.192 -14.66,-16.192 -13.997,-15.53 ; v2(-25.718,-5.08) -23.755,-5.08 -23.755,-7.042 -23.177,-7.62 -17.145,-7.62 ; v1(-19.367,7.302) -19.367,4.445 -16.828,4.445 -16.192,3.81 -16.192,-0.635 -15.328,-1.5 C105.2 ; -11.112,-4.445 -11.112,-1.27 -12.512,0.13 -12.512,1.587 C101.1 -12.83,6.22 v3(-11.112,7.938) ; v1(-7.173,44.58) -7.173,38.288 -6.35,38.288 C206.1 ; U31.19 U31.20 ; -6.052,-12.085 -5.362,-12.085 -4.817,-12.085 -3.81,-12.085 ; v2(-3.81,-11.43) -3.81,-12.085 ; 1.587,-8.255 1.587,-11.747 1.25,-12.085 -3.81,-12.085 ; C205.1 6.855,38.288 7.62,39.052 7.62,41.592 8.255,42.227 19.05,42.227 19.05,40.355 K21.2 ; U31.1 U31.2 10.608,20.32 C302.2 ; 8.608,-29.527 U21.2 U21.1
  Bottom Layer w0.508: v3(-11.112,7.938) -11.112,9.078 C301.2 -10.03,10.16 U31.11 ; U12.10 -7.24,23.115 ; v3(-7.302,29.21) -7.24,29.148 -7.24,23.115 ; U31.20 -6.55,22.425 -7.24,23.115 ; v3(-6.35,36.83) -6.35,38.288 ; v3(6.35,22.86) 6.55,22.66 U31.1 ; U31.10 3.81,10.16 3.81,19.685 4.445,20.32 U31.2 ; K21.2 19.4,40.005 22.86,40.005 22.86,38.417 ; P31.6 24.13,35.56 22.86,36.83 22.86,38.417 ; P33.5 36.195,37.783 35.56,38.417 22.86,38.417
  Bottom Layer w0.635: 1.587,-8.255 3.045,-8.255 C103.1 C103.1@3.325,-7.975 ; v2@8.525,-16.51 8.525,-17.097 9.17,-17.742 ; v2(8.572,-16.51) R203.2 11.468,-11.075 11.835,-10.707 C207.2 11.835,-6.897 12.383,-6.35 v1(14.922,-6.35) ; v2(9.525,-19.05) 9.17,-18.695 9.17,-17.742 ; D204.2@10.243,-33.337 D204.2 8.608,-33.337 8.608,-29.527 8.608,-25.682 9.207,-25.082 C202.2 v2(12.065,-25.082) 12.065,-27.493 C201.1 ; R214.2 11.43,-17.742 9.17,-17.742 ; D200.2 D200.1 19.8,-13.45 v2(20.002,-13.652) ; 33.973,-19.685 36.83,-16.828 36.83,-13.97 P35.6 P35.5 ; J21.2 34.012,-19.685
  Bottom Layer w1.27: B21.V- 27.167,-12.7 24.765,-12.7 v6(24.765,-21.273) 33.135,-21.273 J21.2
  other v1: -22.542,-35.242 -16.828,-35.242 -10.16,-35.242 -3.175,-35.242 3.492,-35.242 5.397,-35.242 7.302,-35.242 9.842,-35.242 12.065,-35.242 14.287,-35.242 16.828,-35.242 20.002,-35.242 22.225,-34.925 -4.763,-33.02 -2.857,-33.02 28.892,-32.703 -29.527,-31.75 32.067,-30.797 -22.542,-30.162 -16.828,-30.162 -10.16,-30.162 -4.763,-29.845 -2.857,-29.845 -0.953,-29.845 1.587,-29.845 10.16,-26.987 31.115,-25.4 -3.175,-25.082 1.27,-25.082 4.445,-25.082 37.465,-24.765 -22.542,-24.447 -15.557,-24.447 -10.16,-24.447 1.27,-22.86 12.7,-22.543 -22.542,-20.955 -3.175,-20.637 -36.83,-20.002 32.067,-18.098 -38.1,-16.51 39.37,-15.875 41.593,-15.875 0.318,-10.477 -41.91,-7.62 41.91,-7.62 6.35,-3.175 -30.797,-2.857 14.922,-2.222 2.857,1.905 10.477,1.905 22.543,2.222 32.067,2.222 -30.797,3.175 -30.797,6.667 10.795,9.207 16.192,9.207 24.13,9.207 31.115,9.207 -25.717,10.795 19.685,13.97 -25.717,16.51 -21.272,16.51 24.447,17.462 31.115,19.05 -9.207,20.002 -25.717,22.543 -21.272,22.543 14.605,23.812 24.447,23.812 -8.89,27.94 -0.953,27.94 6.667,27.94 -41.592,29.845 41.593,29.845 31.115,31.115 -8.89,33.02 41.593,33.337 6.667,33.972 14.605,33.972 -24.765,34.29 19.685,35.877 26.352,35.877 -39.052,36.512 -0.635,37.148 2.54,37.148 -32.067,39.37 8.89,40.322 14.605,40.64 -31.432,43.18 -14.922,43.18 -10.16,43.18 7.62,44.767 14.605,44.767 -11.43,46.355 -25.717,46.672 25.082,47.307 -18.098,49.212 17.78,49.53 -11.43,50.165 -3.81,50.165 3.81,50.165 9.842,50.165
I2C_SCK: P34.1 U11.45 | length 57.2
  Bottom Layer w0.254: P34.1 -32.067,31.75 -31.75,31.432 -31.75,8.572 -31.726,8.572 -31.294,8.141 -27.305,8.141 -27.102,7.938 -27.102,-7.823 -26.333,-8.592 U11.45
I2C_SDA: P34.2 U11.46 | length 61.6
  Bottom Layer w0.254: P34.2 -34.925,33.02 -31.115,33.02 -31.115,8.572 -26.987,8.572 -26.67,8.255 -26.67,-7.62 -26.162,-8.128 -15.798,-8.128 U11.46
LED_ROUGE: R101.2 U11.18 | length 57.8
  Top Layer w0.254: v1(-18.098,35.56) R101.2@-18.098,38.265 ; v1@-14.605,22.225 v1(-14.402,22.022) -14.402,4.242 -13.335,3.175 -13.335,-7.302 -12.7,-7.938 v1(-12.7,-8.89)
  Bottom Layer w0.254: v1(-18.098,35.56) -14.922,35.56 -13.365,34.003 -13.365,22.927 -14.27,22.022 v1(-14.402,22.022) ; v1(-12.7,-8.89) -11.998,-9.592 U11.18
LED_VERTE: R102.2 U11.19 | length 74.1
  Top Layer w0.254: v1(-21.59,34.925) -21.59,37.502 R102.2 ; v1(-13.97,23.177) -13.335,22.543 -13.335,12.065 -13.97,11.43 -13.97,10.795 -13.576,10.401 -13.576,4.763 v1(-6.667,4.763) ; v1(-4.763,-10.477) -3.175,-10.477 -1.905,-9.207 -1.27,-9.207 -0.635,-8.572 -0.635,-2.222 -2.222,-0.635 -2.222,0.953 -3.899,2.629 -3.899,4.894 v1(-3.726,5.067)
  Bottom Layer w0.254: v1(-21.59,34.925) -15.24,34.925 -13.97,33.655 v1(-13.97,23.177) ; U11.19 -5.782,-10.093 -5.397,-10.477 v1(-4.763,-10.477) ; v1(-6.667,4.763) -6.363,5.067 v1(-3.726,5.067)
MESURE_VBAT: C207.1 D200.3 L202.2 U11.14 | length 40.4
  Top Layer w0.254: v1(-1.905,-10.16) -1.905,-13.652 -0.953,-14.605 v1(16.192,-14.605)
  Bottom Layer w0.254: U11.14 -2.568,-7.592 -1.905,-8.255 v1(-1.905,-10.16) ; L202.2 v1(16.192,-14.605) 16.192,-12.383 14.922,-11.112 14.922,-9.437 14.982,-9.377 D200.3
NetC105_1: C105.1 L101.2 U11.9 | length 38.9
  Top Layer w0.305: v1(-18.098,0.318) -17.462,0.953 -17.462,6.35 v1(-17.78,6.35) ; v1(-14.287,0) -13.97,-0.318 -13.97,-9.842 -13.652,-10.16 -10.795,-10.16 -10.477,-9.842 v1(-10.477,-8.572)
  Bottom Layer w0.254: U11.9 -10.498,-8.552 v1(-10.477,-8.572)
  Bottom Layer w0.305: v1(-17.78,6.35) -14.922,6.35 -14.922,1.27 -14.287,0.635 v1(-14.287,0)
  Bottom Layer w0.406: L101.2 -18.645,-1.587 C105.1 -18.327,0.088 v1(-18.098,0.318)
NetC205_2: C205.2 U20.3 | length 3.5
  Bottom Layer w0.305: U20.3 3.485,40.315 4.257,41.087 C205.2
NetC206_2: C206.2 U20.7 | length 4.1
  Bottom Layer w0.305: C206.2 -4.64,40.965 U20.7
NetD101_1: D101.1 R101.1 | length 6.8
  Top Layer w0.406: D101.1 -21.235,44.095 -20.002,42.862 -18.732,42.862 -18.098,42.228 R101.1@-18.098,39.965
NetD101_2: D101.2 R102.1 | length 8.2
  Top Layer w0.406: R102.1 -21.59,40.603 -22.785,41.797 -22.785,46.113 D101.2
NetD204_1: D204.1 L201.1 U21.4 | length 7.7
  Bottom Layer w0.406: L201.1 6.813,-31.895 ; D204.1 6.937,-32.02 6.813,-31.895 ; U21.4 7.407,-31.3 6.813,-31.895
NetJ101_1: J101.1 R108.1 | length 5.9
  Top Layer w0.406: v4(-32.067,-15.557) -30.48,-15.557 J101.1
  Bottom Layer w0.406: R108.1 v4(-32.067,-15.557)
NetK21_4: K21.4 U20.2 | length 20.1
  Bottom Layer w0.254: U20.2 2.877,40.965 3.632,41.721 3.632,41.732 3.81,41.91 3.81,42.862 18.732,42.862 19.36,43.49 K21.4
NetL202_1: L202.1 R213.1 R214.1 | length 10.6
  Bottom Layer w0.254: L202.1 10.795,-14.65 10.795,-15.557 12.383,-17.145 15.875,-17.145 ; R214.1 15.837,-17.183 15.875,-17.145 ; R213.1 17.682,-17.145 15.875,-17.145
NetQ22_1: Q22.1 R216.1 | length 3.9
  Bottom Layer w0.406: Q22.1 -20.322,12.063 -20.04,12.345 R216.1
NetQ23_4: Q23.4 R206.1 | length 9.5
  Bottom Layer w0.305: R206.1 18.415,-27.902 18.415,-33.02 Q23.4
NetR205_2: R205.2 R206.2 U20.6 | length 94
  Top Layer w0.254: v1(9.207,25.717) 9.525,25.4 9.525,21.273 12.7,21.273 13.335,20.637 v1(13.335,16.51) ; v1(13.335,-1.905) v1(13.335,7.62)
  Bottom Layer w0.254: U20.6 0.628,40.315 0.628,35.885 0.635,35.877 0.635,26.67 1.587,25.717 v1(9.207,25.717) ; v1@13.277,-1.905 v1(13.335,-1.905) ; v1(13.335,7.62) v1(13.335,16.51)
  Bottom Layer w0.305: v1(13.335,-1.905) 13.335,-3.81 13.97,-4.445 22.86,-4.445 22.86,-20.32 22.543,-20.637 17.78,-20.637 16.865,-21.552 R205.2 R206.2
OUTDROIT_A: C304.2 P32.1 U31.16 | length 41.3
  Bottom Layer w0.406: C304.2 -24.26,27.81 P32.1 -22.86,29.21 -22.86,32.703 -15.875,32.703 -15.875,17.145 -15.24,16.51 U31.16
OUTDROIT_B: C304.1 P32.2 U31.17 | length 39.7
  Bottom Layer w0.406: C304.1 -24.26,30.61 P32.2 -24.13,33.02 -23.495,33.655 -15.557,33.655 -15.24,33.337 -15.24,18.098 -14.922,17.78 U31.17
OUTGAUCHE_A: C303.2 P31.1 U31.4 | length 23.2
  Bottom Layer w0.406: U31.4 7.62,17.78 8.572,18.732 16.51,18.732 16.828,19.05 16.828,26.858 C303.2 18.92,27.81 P31.1
OUTGAUCHE_B: C303.1 P31.2 U31.5 | length 30.6
  Bottom Layer w0.406: U31.5 8.572,16.51 9.207,17.145 9.207,18.098 17.462,18.098 17.462,22.543 18.098,23.177 20.002,23.177 20.32,23.495 20.32,29.21 P31.2 18.92,30.61 C303.1
PWM_CHARGE: U11.13
PWM_DROIT: U11.11 U31.14 | length 22.2
  Top Layer w0.254: v1(-9.207,7.302) -8.89,7.62 v1(-8.89,13.652)
  Bottom Layer w0.254: U11.11 -9.498,0.681 -9.25,0.929 -9.25,7.26 v1(-9.207,7.302) ; v1(-8.89,13.652) -8.572,13.652 -8.255,13.97 U31.14
PWM_GAUCHE: U11.12 U31.8 | length 36.2
  Bottom Layer w0.254: U11.12 -8.997,0.528 -8.818,0.707 -8.818,5.715 -7.548,6.985 7.62,6.985 8.255,7.62 8.255,12.7 U31.8
PWR_JACK_SENSE: J21.3 U11.22 | length 55.6
  Top Layer w0.254: v1(-5.397,-11.112) -5.397,-16.192 6.35,-16.192 7.62,-17.462 10.795,-17.462 12.383,-15.875 v1(26.67,-15.875) ; v1(29.527,-19.05) J21.3@38.913,-19.05
  Top Layer w0.305: J21.3@38.913,-19.05 J21.3
  Bottom Layer w0.254: U11.22 -6.278,-11.593 -6.262,-11.577 -5.862,-11.577 v1(-5.397,-11.112) ; v1@26.708,-15.913 26.708,-17.78 27.978,-19.05 v1(29.527,-19.05)
  Bottom Layer w0.305: v1(26.67,-15.875) v1@26.708,-15.913
SHUTDOWN: R204.2 U11.41 U20.8 | length 95.3
  Top Layer w0.254: v1(-17.78,-10.795) -17.462,-10.477 -17.462,-6.35 -18.415,-5.397 -22.86,-5.397 -22.86,8.89 -22.542,9.207 -20.002,9.207 -19.685,9.525 -19.685,15.24 -19.367,15.557 -15.557,15.557 v1(-15.24,15.24) ; v1(-5.08,27.94) -5.08,28.892 -4.763,29.21 -2.54,29.21 -2.222,29.527 -2.222,32.385 -2.54,32.703 v1(-4.763,32.703)
  Bottom Layer w0.254: v1(-17.78,-10.795) -17.577,-10.592 U11.41 ; v1(-15.24,15.24) -10.16,15.24 -9.495,15.905 -5.449,15.905 -5.08,16.275 v1(-5.08,27.94) ; v1(-4.763,32.703) -4.763,35.877 -3.175,37.465 -3.175,39.688 -6.35,39.688 -6.35,42.862 -4.763,42.862 ; R204.2 -4.725,42.9 -4.763,42.862 ; U20.8 -1.565,41.615 -1.587,41.592 -1.625,41.63 -1.625,42.862 -4.763,42.862
SPI_CLK: P33.1 U11.15 | length 82.3
  Top Layer w0.254: v1(-3.175,-8.255) -2.222,-7.302 v1(-2.222,-1.905)
  Bottom Layer w0.254: U11.15 -3.337,-8.093 v1(-3.175,-8.255) ; v1(-2.222,-1.905) -2.222,3.492 -1.905,3.81 33.338,3.81 33.973,4.445 33.973,28.892 34.925,29.845 36.195,29.845 P33.1
SPI_MISO: P33.3 U11.16 | length 85.9
  Top Layer w0.254: v1(-3.492,-9.207) -4.127,-8.572 -4.127,-8.255 -2.857,-6.985 v1(-2.857,-0.953)
  Bottom Layer w0.254: U11.16 -4.108,-8.592 v1(-3.492,-9.207) ; v1(-2.857,-0.953) -2.857,4.127 -2.54,4.445 32.703,4.445 33.338,5.08 33.338,29.527 34.925,31.115 34.925,33.655 35.56,34.29 P33.3
SPI_MOSI: P33.2 U11.17 | length 81.4
  Top Layer w0.254: v1(-4.445,-9.525) -4.559,-9.411 -4.559,-7.938 -3.492,-6.871 v1(-3.492,-1.587)
  Bottom Layer w0.254: U11.17 -4.56,-9.093 -4.445,-9.207 v1(-4.445,-9.525) ; v1(-3.492,-1.587) -3.492,4.445 -2.857,5.08 32.385,5.08 32.703,5.397 32.703,30.798 P33.2
TCK: J101.4 R107.2 U11.37 | length 31
  Top Layer w0.203: J101.4 -31.75,-25.68 R107.2
  Bottom Layer w0.254: v1(-31.75,-24.447) -28.575,-24.447 -28.257,-24.13 -28.257,-17.145 -22.225,-17.145 -22.225,-13.335 -21.483,-12.593 U11.37
TDI: J101.8 R106.1 U11.38 | length 37.2
  Top Layer w0.254: J101.8 -34.29,-20.32 v1(-29.21,-20.32) -28.258,-20.32 -27.94,-20.002 -27.94,-14.287 -29.808,-14.287 R106.1
  Bottom Layer w0.254: v1(-29.21,-20.32) -29.096,-20.206 -29.096,-16.713 -22.86,-16.713 -22.86,-13.018 -21.935,-12.092 U11.38
TDO: J101.6 R105.1 U11.39 | length 39.8
  Top Layer w0.254: J101.6 -33.02,-28.892 -32.702,-29.21 R105.1
  Bottom Layer w0.254: v1(-33.02,-26.352) -33.02,-23.812 -30.162,-23.812 -30.162,-16.192 -23.495,-16.192 -23.495,-12.383 -22.705,-11.593 U11.39
TMS: J101.2 R104.1 U11.34 | length 38.1
  Top Layer w0.254: J101.2 -30.355,-22.225 -27.622,-22.225 -27.305,-21.907 v1(-27.305,-19.685) -27.305,-9.207 -27.66,-8.853 R104.1
  Bottom Layer w0.254: v1(-27.305,-19.685) -13.97,-19.685 -13.489,-19.204 -13.489,-13.901 U11.34
USART_RX_XBEE: U11.43 U12.2 | length 79.1
  Top Layer w0.254: v2(-27.94,7.302) -27.94,35.56 -25.082,35.56 -24.13,36.512 -24.13,38.735 -24.51,39.115 v2(-25.4,39.115)
  Bottom Layer w0.254: v2(-27.94,7.302) -27.622,7.302 -27.622,-8.89 -26.92,-9.592 U11.43 ; v2(-25.4,39.115) U12.2
USART_TX_XBEE: U11.42 U12.3 | length 76.8
  Top Layer w0.254: v2(-28.892,6.032) -28.892,35.877 -27.622,37.148 v2(-25.4,37.148)
  Bottom Layer w0.254: v2(-28.892,6.032) -28.575,5.715 -28.257,5.715 -28.257,-9.207 -27.372,-10.093 U11.42 ; v2(-25.4,37.148) -25.367,37.115 U12.3
VBAT: B21.V+ J21.1 Q23.1 Q23.2 Q23.3 R205.1 U20.1 | length 135.6
  Top Layer w0.305: v1(2.222,43.497) 2.857,42.862 5.08,42.862 v1(5.08,36.195) ; v1(24.447,2.54) v1(24.447,6.35)
  Top Layer w1.27: B21.V+ 27.305,-25.538 27.305,-17.462 28.818,-15.95 J21.1
  Bottom Layer w0.305: U20.1 2.222,41.893 v1(2.222,43.497) ; v1(5.08,36.195) 10.537,36.195 10.595,36.137 11.405,36.137 11.463,36.195 15.557,36.195 17.145,34.608 22.86,34.608 22.86,29.857 23.317,29.399 23.317,29.388 23.495,29.21 26.035,29.21 26.987,28.258 26.987,6.35 v1(24.447,6.35) ; R205.1 21.59,-23.177 ; Q23.1@21.59,-29.21 21.59,-23.177 ; v1(24.447,2.54) 24.447,-4.445 23.495,-4.445 23.495,-21.59 21.907,-23.177 21.59,-23.177
  Bottom Layer w0.508: Q23.3 22.86,-31.75 22.86,-30.48 ; Q23.2 22.86,-30.48 ; Q23.1@21.59,-29.21 22.86,-29.21 22.86,-30.48
  Bottom Layer w1.27: 22.86,-30.48 25.717,-30.48 27.317,-28.88 B21.V+
pads on no net: J101.7 K21.1 K21.3 Moteur_Droit.0 Moteur_Droit.1 Moteur_Gauche.0 Moteur_Gauche.1 P35.3 P35.4 P36.3 P36.4 U11.3 U11.4 U11.5 U11.6 U11.10 U11.20 U11.40 U12.4 U12.5 U12.6 U12.7 U12.8 U12.9 U12.11 U12.12 U12.13 U12.14 U12.15 U12.16 U12.17 U12.18 U12.19 U12.20 U31.3 U31.18 U31.21

## Polygon pours and split planes (outlines as drawn)
GND on Top Layer "Top Overlay-GND" (solid, remove dead copper, pour order 4): -47.307,52.705 -46.99,53.022 48.895,53.022 48.895,-39.37 48.578,-39.052 -47.625,-39.052
GND on Bottom Layer "Bot Overlay-GND" (solid, remove dead copper, pour order 6): -47.625,-39.052 48.895,-39.052 48.895,52.705 49.213,53.022 -46.99,53.022

## Keep-outs
Keep-Out Layer:
  the board outline again, w0.254

## Other copper
Top Layer:
  text "1" at -14.922,47.942 h1.52
Bottom Layer:
  text "2" at -14.287,47.942 h1.52

## Silkscreen, mask and mechanical layers (free items; w line width, h text height)
Top Overlay:
  text "CR" at -4.445,34.925 h5
  text "FU" at -4.763,29.527 h5
Bottom Overlay:
  drawing of 13 lines, arcs and shapes, not listed
  text "Departement GEI" at 31.432,26.035 h1.52 r90
  text "pwW" at 21.59,16.51 h5 r90
  text "2016" at 28.575,10.16 h1.52 r90
  text "Dumber V2.2" at -24.13,-32.067 h1.52 r180
Mechanical 15:
  lines w0.254: -43.002,-40.862 -42.998,-41.37 ; -43,-43.497 -43,-38.735 ; -41.48,-40.597 -43,-41.116 ; -41.472,-41.613 -43,-41.116 ; -8.024,-40.858 -43,-41.116 ; 8.024,-40.74 43,-40.481 ; 41.472,-39.985 43,-40.481 ; 41.48,-41 43,-40.481 ; 42.998,-40.227 43.002,-40.735 ; 43,-42.545 43,-38.417 ; 45.72,-36.5 52.705,-36.5 ; 46.355,51.5 53.658,51.5 ; 48.705,-34.976 49.213,-36.5 ; 48.705,49.976 49.213,51.5 ; 48.959,-36.5 49.467,-36.5 ; 48.959,51.5 49.467,51.5 ; 49.213,2.396 49.213,-36.5 ; 49.213,12.604 49.213,51.5 ; 49.721,-34.976 49.213,-36.5 ; 49.721,49.976 49.213,51.5
  text "88 (mm)" at 50.127,2.65 h1.52 r90
  text "86.002 (mm)" at -7.763,-41.77 h1.52 r0.42

## Text inside footprints (layer, text, board x,y; h text height)
B21: Top Overlay "9V" at 30.48,-24.447 h1.52 r270; Top Overlay "GND" at 29.817,-10.55 h1.52 r270
P31: Top Overlay "6" at 26.035,30.162 h1.27; Top Overlay "5" at 26.035,27.305 h1.27; Top Overlay "2" at 16.192,30.162 h1.27; Top Overlay "1" at 16.51,27.305 h1.27
P32: Top Overlay "6" at -16.828,30.162 h1.27; Top Overlay "5" at -16.828,27.622 h1.27; Top Overlay "2" at -26.987,29.845 h1.27; Top Overlay "1" at -26.67,26.987 h1.27
P33: Top Overlay "6" at 33.973,38.735 h1.27 r90; Top Overlay "5" at 36.513,38.735 h1.27 r90; Top Overlay "2" at 33.973,28.892 h1.27 r90; Top Overlay "1" at 36.83,29.527 h1.27 r90
P34: Top Overlay "6" at -35.877,38.735 h1.27 r90; Top Overlay "5" at -33.337,38.735 h1.27 r90; Top Overlay "2" at -35.877,28.892 h1.27 r90; Top Overlay "1" at -33.02,29.21 h1.27 r90
P35: Top Overlay "6" at 32.703,-11.747 h1.27 r180; Top Overlay "5" at 32.703,-8.89 h1.27 r180; Top Overlay "2" at 40.958,-13.97 h1.27 r180; Top Overlay "1" at 42.228,-8.89 h1.27 r180
P36: Top Overlay "6" at -40.322,-14.287 h1.27 r180; Top Overlay "5" at -41.91,-8.89 h1.27 r180; Top Overlay "2" at -32.067,-11.747 h1.27 r180; Top Overlay "1" at -32.702,-8.89 h1.27 r180
U12: Top Overlay "1" at -13.97,40.64 h1.52